# EAGLE board Adafruit 1.69in 280x240 Round Rectangle TFT (EAGLE 9.6.2)
REV: B
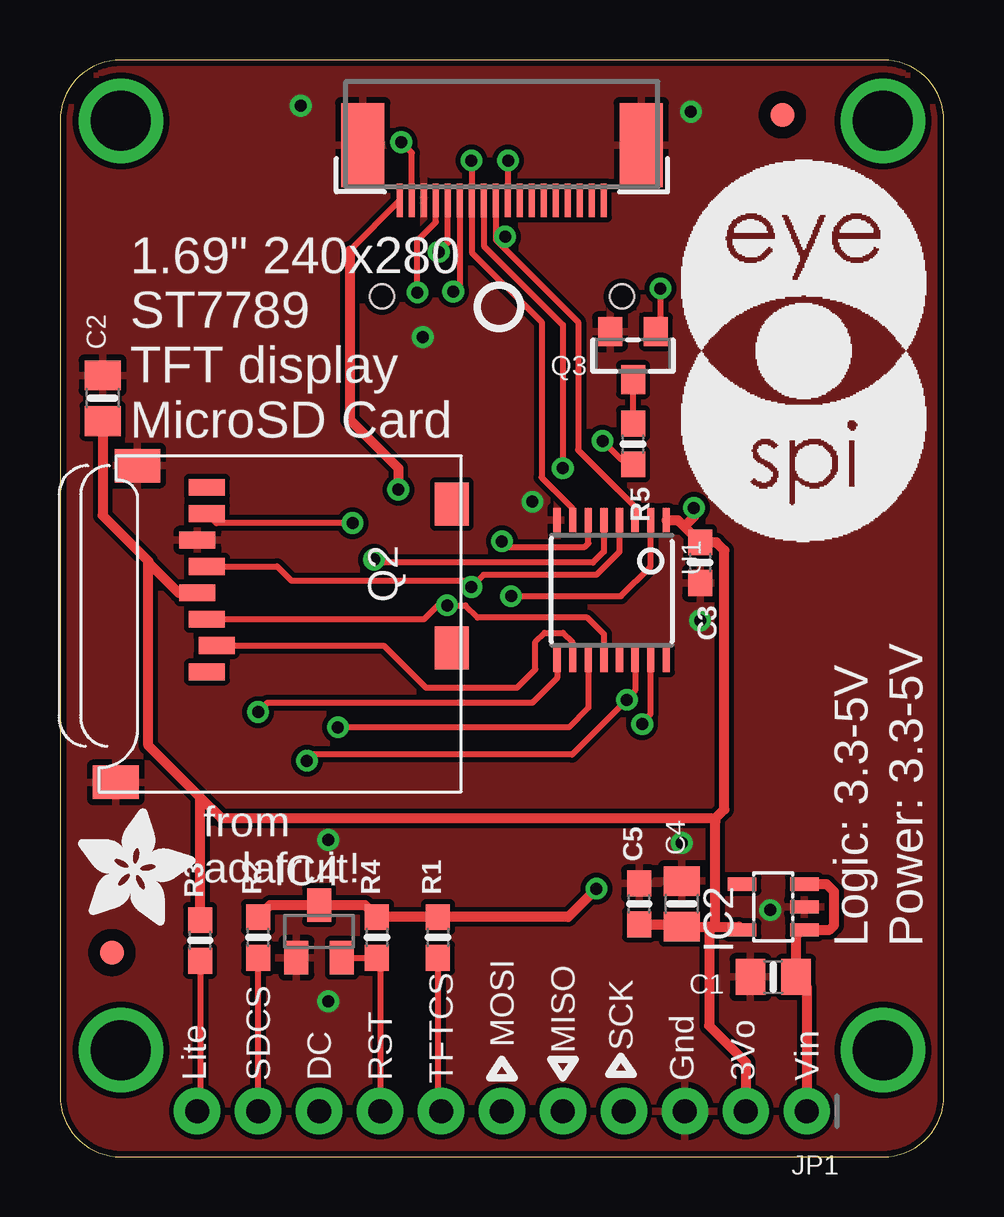
[diagram p0: board, top side]
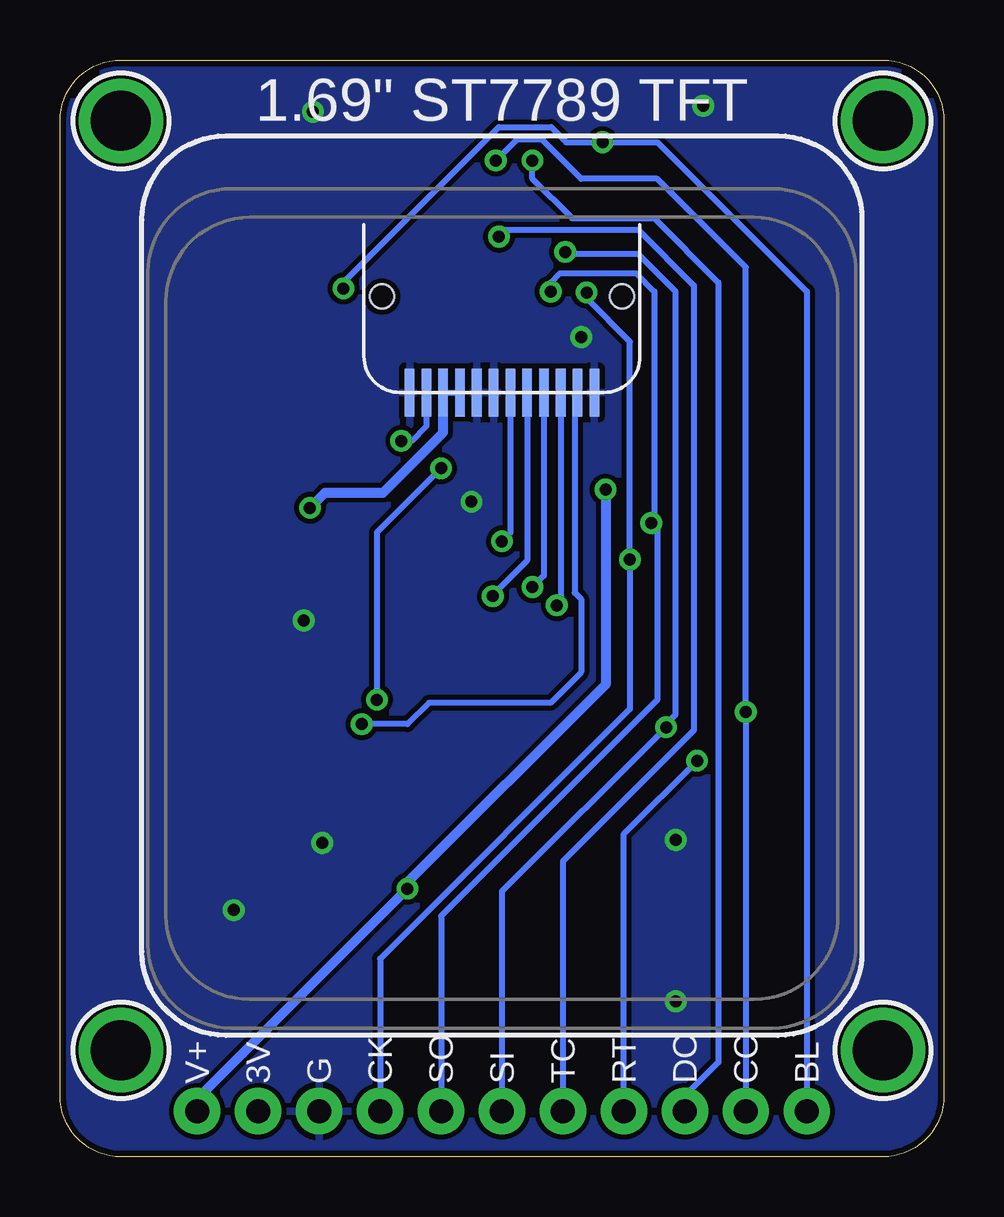
[diagram p1: board, bottom side, seen from below]

Size 36.83 x 45.72 mm. Coordinates in mm from the lower left corner, seen from the top.
Outline: 0,43.18 0,2.54 arc90 2.54,0 34.29,0 arc90 36.83,2.54 36.83,43.18 arc90 34.29,45.72 2.54,45.72 arc90 0,43.18
Copper layers (1*16): Top 0.035mm / dielectric 1.5mm / Bottom 0.035mm
Design rules "adafruit *": minimum track width 8mil, minimum drill 15.5mil, track to track 8mil, track to pad 8mil, pad to pad 8mil, via to via 8mil, smd to smd 8mil, copper to edge 10mil, drill to drill 8mil, minimum pad ring 10mil, minimum via ring 8mil, stop-mask expansion 2mil, vias tented up to drill 20mil, thermal gap 10mil
Net classes: 1 power: width 0.254 mm

## Footprints (pad centres in the part's own frame; a part is rotated, then mirrored left to right if it is on the bottom)
0805-NO = smd 1.24 x 1.5: 1 -0.95,0; 2 0.95,0
0603-NO = smd 1.075 x 1: 1 -0.85,0; 2 0.85,0
TFT_1.69IN_240X280_12P = smd 0.4 x 2: 1 3.85,-9; 2 3.15,-9; 3 2.45,-9; 4 1.75,-9; 5 1.05,-9; 6 0.35,-9; 7 -0.35,-9; 8 -1.05,-9; 9 -1.75,-9; 10 -2.45,-9; 11 -3.15,-9; 12 -3.85,-9 | hole 1: -5,-13; 5,-13
SOT23-5L = smd 0.55 x 1.2: 1 -0.95,-1.3; 2 0,-1.3; 3 0.95,-1.3; 4 0.95,1.3; 5 -0.95,1.3
SOT23 = smd 1 x 1.4: 1 -0.95,-1.1; 2 0.95,-1.1; 3 0,1.1
1X11_ROUND_76 = drill 1 pad 1.93: 1 -12.7,0; 2 -10.16,0; 3 -7.62,0; 4 -5.08,0; 5 -2.54,0; 6 0,0; 7 2.54,0; 8 5.08,0; 9 7.62,0; 10 10.16,0; 11 12.7,0
MICROSD = smd 0.7 x 1.5: 1 9,-10.64; 2 7.9,-10.24; 3 6.8,-10.64; 4 5.7,-11.04; 5 4.6,-10.64; 6 3.5,-11.04; 7 2.4,-10.64; 8 1.3,-10.64 | smd 1.8 x 1.4: CD1 2,-0.44; CD2 8,-0.44 | smd 1.4 x 1.9: MT1 0.4,-13.54; MT2 13.6,-14.44
SOT23-WIDE = smd 1 x 1.2: 1 -0.95,-1; 2 0.95,-1; 3 0,1
TSSOP16 = smd 0.305 x 0.991: 1 -2.275,-2.918; 2 -1.625,-2.918; 3 -0.975,-2.918; 4 -0.325,-2.918; 5 0.325,-2.918; 6 0.975,-2.918; 7 1.625,-2.918; 8 2.275,-2.918; 9 2.275,2.918; 10 1.625,2.918; 11 0.975,2.918; 12 0.325,2.918; 13 -0.325,2.918; 14 -0.975,2.918; 15 -1.625,2.918; 16 -2.275,2.918
FIDUCIAL_1MM = smd 1 x 1: 1 0,0
MOUNTINGHOLE_2.5_PLATED = drill 2.5 pad 3.2: P$1 0,0
EYE_SPI_DISPLAY_BOTCONTACT = smd 0.25 x 1.4: 1 -4.25,-2.678; 2 -3.75,-2.678; 3 -3.25,-2.678; 4 -2.75,-2.678; 5 -2.25,-2.678; 6 -1.75,-2.678; 7 -1.25,-2.678; 8 -0.75,-2.678; 9 -0.25,-2.678; 10 0.25,-2.678; 11 0.75,-2.678; 12 1.25,-2.678; 13 1.75,-2.678; 14 2.25,-2.678; 15 2.75,-2.678; 16 3.25,-2.678; 17 3.75,-2.678; 18 4.25,-2.678 | smd 1.8 x 3.5: SUPPORT1 5.8,-0.372; SUPPORT2 -5.8,-0.372

## Placement (x,y rotation side)
C1  10uF  [0805-NO]  29.72,7.49 180 top
C2  10uF  [0805-NO]  1.78,31.62 90 top
C3  0.1uF  [0603-NO]  26.67,24.77 270 top
C4  10uF  [0805-NO]  25.91,10.54 90 top
C5  0.1uF  [0603-NO]  24.13,10.54 90 top
DISP1  DISP_LCD_GENERIC_SPI_1.69_WRAPUNDER  [TFT_1.69IN_240X280_12P]  18.41,22.86 180 bottom
IC2  AP2112  [SOT23-5L]  29.72,10.41 90 top
IC4  APX803-SAG  [SOT23]  10.8,9.4 0 top
JP1  [1X11_ROUND_76]  18.41,1.91 180 top
Q2  MICROSD  [MICROSD]  16.76,29.21 270 top
Q3  BSS138  [SOT23-WIDE]  23.88,33.4 180 top
R1  10K  [0603-NO]  15.75,9.14 90 top
R2  10K  [0603-NO]  8.25,9.14 90 top
R3  10K  [0603-NO]  5.84,9.02 90 top
R4  10K  [0603-NO]  13.21,9.14 90 top
R5  10  [0603-NO]  23.88,29.72 270 top
U1  74HC4050PWR  [TSSOP16]  22.99,23.62 180 top
U$1  [ADAFRUIT_5MM]  0.76,9.65 0 top
U$2  [PCBFEAT-REV-040]  18.29,35.43 180 top
U$4  FIDUCIAL_1MM  [FIDUCIAL_1MM]  30.1,43.43 270 top
U$5  FIDUCIAL_1MM  [FIDUCIAL_1MM]  2.16,8.51 0 top
U$7  MOUNTINGHOLE2.5  [MOUNTINGHOLE_2.5_PLATED]  34.29,43.18 270 bottom
U$8  MOUNTINGHOLE2.5  [MOUNTINGHOLE_2.5_PLATED]  2.54,43.18 270 bottom
U$9  MOUNTINGHOLE2.5  [MOUNTINGHOLE_2.5_PLATED]  34.29,4.45 270 bottom
U$10  MOUNTINGHOLE2.5  [MOUNTINGHOLE_2.5_PLATED]  2.54,4.45 270 bottom
U$19  [EYESPI_LOGO]  25.78,25.4 0 top
X1  EYE_SPI_DISPLAY_FLIP  [EYE_SPI_DISPLAY_BOTCONTACT]  18.41,42.55 0 top

## Library data of the parts
C1-C5 JP1 Q3 R1-R5 U1 U$1 U$2 = microbuilder
DISP1 X1 = adafruit_display
IC2 IC4 Q2 = adafruit
U$4 U$5 U$7-U$10 = microbuilder; BOM: EXCLUDE
U$19 = silks

## Nets
+3V3 [power]: C2.1 C3.1 C4.1 C5.1 DISP1.3 DISP1.4 IC2.5 JP1.2 Q2.4 R3.2 U1.1
CARDCS: JP1.10 R2.1 U1.9 X1.10
CARDCS_3V: Q2.2 U1.10
GND: C1.2 C2.2 C3.2 C4.2 C5.2 DISP1.1 DISP1.5 DISP1.6 DISP1.12 IC2.2 IC4.1 JP1.3 Q2.6 Q2.MT1 Q2.MT2 Q3.2 U1.8 X1.3 X1.SUPPORT1 X1.SUPPORT2
LEDK: DISP1.2 R5.2
LITE: JP1.11 Q3.1 R3.1 X1.2
MISO: JP1.5 Q2.7 X1.6
MOSI: JP1.6 U1.11 X1.5
MOSI_3V: DISP1.10 Q2.3 U1.12
N$1: Q3.3 R5.1
SCK: JP1.4 U1.5 X1.4
SCK_3V: DISP1.9 Q2.5 U1.4
TFTCS: JP1.7 R1.1 U1.3 X1.9
TFTCS_3V: DISP1.8 U1.2
TFTDC: JP1.9 U1.7 X1.7
TFTDC_3V: DISP1.7 U1.6
TFTRST: IC4.2 JP1.8 R4.1 U1.14 X1.8
TFTRST_3V: DISP1.11 U1.15
VIN [power]: C1.1 IC2.1 IC2.3 IC4.3 JP1.1 R1.2 R2.2 R4.2 X1.1

## Tracks (layer width: path | path; a pad name or v marks a point on that pad's centre or on a via)
+3V3  (via drill 0.5)
  Top 0.254: v26.42,27.05 26.42,26.67 | 25.81,9.69 C4.1 | 28.29,9.59 IC2.5 | 27.3,14.1 27.3,13.97 27.18,14.1
  Top 0.406: R3.2 5.84,14.99 | U1.1 25.74,26.54 26.02,26.27 | 26.02,26.27 C3.1 27.34,25.61 27.69,25.27 27.69,14.48 27.3,14.1 | 26.42,26.67 26.02,26.27 | C5.1 25.81,9.69 | C4.1 27.05,9.59 | 27.05,9.59 27.3,9.59 | 27.3,9.59 28.29,9.59 | 27.3,9.59 27.3,13.97 | 27.18,14.1 6.73,14.1 5.84,14.99 | C2.1 1.78,26.73 3.68,24.83 3.68,24.77 | 3.68,24.77 4.94,23.51 Q2.4 | 5.84,14.99 3.68,17.14 3.68,24.77 | JP1.2 28.57,3.94 27.05,5.46 27.05,9.59
  Bottom 0.254: DISP1.3 DISP1.4
  Bottom 0.406: v26.42,27.05 25.78,27.69 23.37,27.69 20.86,30.19 DISP1.3
CARDCS  (via drill 0.5)
  Top 0.254: v18.67,41.53 v18.66,41.52 X1.10 | U1.9 20.71,19.95 19.68,18.92 8.64,18.92 v8.25,18.54 | JP1.10 R2.1
  Bottom 0.254: v18.67,41.53 17.78,42.42 16.76,42.42 15.11,40.77 11.94,40.77 8.25,37.08 v8.25,18.54 JP1.10
CARDCS_3V
  Top 0.254: Q2.2 13.49,21.31 15.24,19.56 19.05,19.56 19.81,20.32 19.81,21.46 20.19,21.84 20.95,21.84 21.36,21.44 U1.10
GND  (via drill 0.5)
  other vias: 19.68,27.3 26.67,22.35 15.11,34.16 10.03,43.81 26.29,43.56 11.18,6.48 11.18,13.21 25.91,13.08 29.59,10.29
  pour Top: 0.13,45.72 36.83,45.72 36.83,0 0.13,0
  pour Bottom: 0.13,45.72 36.83,45.72 36.83,0 0.13,0
LEDK  (via drill 0.5)
  Top 0.254: R5.2 23.88,29.08 23.37,29.08 v22.61,29.84
  Bottom 0.254: v22.61,29.84 22.18,29.84 21.56,30.46 DISP1.2
LITE  (via drill 0.5)
  Top 0.254: X1.2 14.66,41.85 v14.22,42.29 | Q3.1 25.02,34.4 v25.02,36.2 | R3.1 5.84,2.03 JP1.11
  Bottom 0.254: v25.02,36.2 25.02,36.45 18.54,42.93 16.37,42.93 15.74,42.29 v14.22,42.29 11.94,42.29 5.71,36.07 JP1.11
MISO  (via drill 0.5)
  Top 0.254: X1.6 16.66,36.35 v16.38,36.07 | v12.19,26.42 6.52,26.42 Q2.7
  Bottom 0.254: v16.38,36.07 16.38,36.45 16,36.83 12.83,36.83 12.07,36.07 12.07,26.54 v12.19,26.42 11.94,26.16 11.94,19.05 20.95,10.03 JP1.5
MOSI  (via drill 0.5)
  Top 0.254: v15.78,37.72 16.16,38.1 X1.5 | U1.11 22.01,18.71 21.21,17.91 v11.58,17.91
  Bottom 0.254: v15.78,37.72 15.7,37.64 12.75,37.64 11.18,36.07 11.18,18.44 11.58,18.03 v11.58,17.91 18.41,11.07 JP1.6
MOSI_3V  (via drill 0.5)
  Top 0.254: Q2.3 15.17,22.41 15.75,22.99 v16.13,22.99 16.89,22.99 17.4,22.48 21.97,22.48 22.66,21.79 U1.12
  Bottom 0.254: DISP1.10 15.96,23.15 v16.13,22.99
N$1
  Top 0.254: R5.1 Q3.3
SCK  (via drill 0.5)
  Top 0.254: U1.5 22.66,25.23 22.2,24.77 13.21,24.77 v13.09,24.89 | v14.89,36.03 14.89,38.19 15.66,38.96 X1.4
  Bottom 0.254: v14.89,36.03 14.89,35.79 13.09,33.98 v13.09,24.89 13.09,18.66 23.49,8.26 JP1.4
SCK_3V  (via drill 0.5)
  Top 0.254: Q2.5 9.04,24.61 9.65,24 16.89,24 v17.14,23.75 17.65,24.26 22.35,24.26 23.31,25.22 U1.4
  Bottom 0.254: DISP1.9 16.66,24.23 v17.14,23.75
TFTCS  (via drill 0.5)
  Top 0.254: X1.9 18.16,38.35 | 18.16,38.35 18.16,38.22 21.59,34.8 21.59,29.46 23.96,27.09 U1.3 | v18.54,38.35 18.16,38.35 | R1.1 15.75,2.03 JP1.7
  Bottom 0.254: v18.54,38.35 18.27,38.63 12.72,38.63 10.41,36.32 10.41,17.78 15.88,12.32 JP1.7
TFTCS_3V  (via drill 0.5)
  Top 0.254: v18.8,23.37 23.37,23.37 24.61,24.61 U1.2
  Bottom 0.254: v18.8,23.37 18.8,23.42 17.36,24.86 DISP1.8
TFTDC  (via drill 0.5)
  Top 0.254: U1.7 21.36,27.02 20.07,28.32 20.07,34.8 17.16,37.7 X1.7 17.16,41.14 17.14,41.16 v17.14,41.53
  Bottom 0.254: v17.14,41.53 17.14,40.77 15.49,39.12 12.07,39.12 9.4,36.45 9.4,3.94 10.92,2.41 10.92,2.03 JP1.9
TFTDC_3V  (via drill 0.5)
  Top 0.254: v18.41,25.65 18.64,25.43 21.87,25.43 22.01,25.57 U1.6
  Bottom 0.254: DISP1.7 18.07,26 v18.41,25.65
TFTRST  (via drill 0.5)
  Top 0.254: IC4.2 R4.1 13.34,8.17 JP1.8 | X1.8 17.66,37.96 20.95,34.67 v20.95,28.7 | U1.14 23.96,19.43 23.62,19.09 v23.62,19.05 21.34,16.76 10.54,16.76 v10.29,16.51
  Bottom 0.254: v20.95,28.7 23.62,26.03 v23.62,19.05 | JP1.8 13.34,13.46 v10.29,16.51
TFTRST_3V  (via drill 0.5)
  Top 0.254: v24.26,18.03 24.26,18.11 24.61,18.46 U1.15
  Bottom 0.254: v24.26,18.03 22.35,18.03 21.46,18.92 16.38,18.92 15.11,20.19 15.11,23.24 15.39,23.52 15.39,31.73 DISP1.11
VIN  (via drill 0.5)
  Top 0.254: 30.67,9.11 IC2.1 | X1.1 12.07,37.77
  Top 0.406: R2.2 8.76,10.5 IC4.3 12.7,10.5 R4.2 R1.2 21.17,9.99 v22.35,11.18 | 30.67,9.11 C1.1 31.11,7.05 JP1.1 | IC2.1 32.07,9.46 32.26,9.65 32.26,11.05 31.94,11.36 IC2.3 | v14.1,27.81 14.1,28.7 12.07,30.73 12.07,37.77
  Bottom 0.254: 31.11,2.41 JP1.1
  Bottom 0.406: v14.1,27.81 14.1,19.68 22.35,11.43 v22.35,11.18 31.11,2.41

## Text on the board
tPlace: 1.69" 240x280 / ST7789 / TFT display / MicroSD Card | from / adafruit! | Logic: 3.3-5V | Power: 3.3-5V | MOSI | MISO | SCK | Lite | SDCS | DC | RST | TFTCS | Gnd | 3Vo | Vin
bPlace: 1.69" ST7789 TFT | BL | CC | DC | RT | TC | SI | SO | CK | G | 3V | V+